# Altium PCB PCB_2021-06-06.pcbdoc
Units mm, origin at the board's own origin, x right, y up, seen from the top; angles counter-clockwise.
Board outline 104.52 x 102.24 mm, 2 copper layers (Top Layer, Bottom Layer); 19 components, 23 nets, 128 pads, 0 vias.
Unrouted connection lines stored in the file: 1.
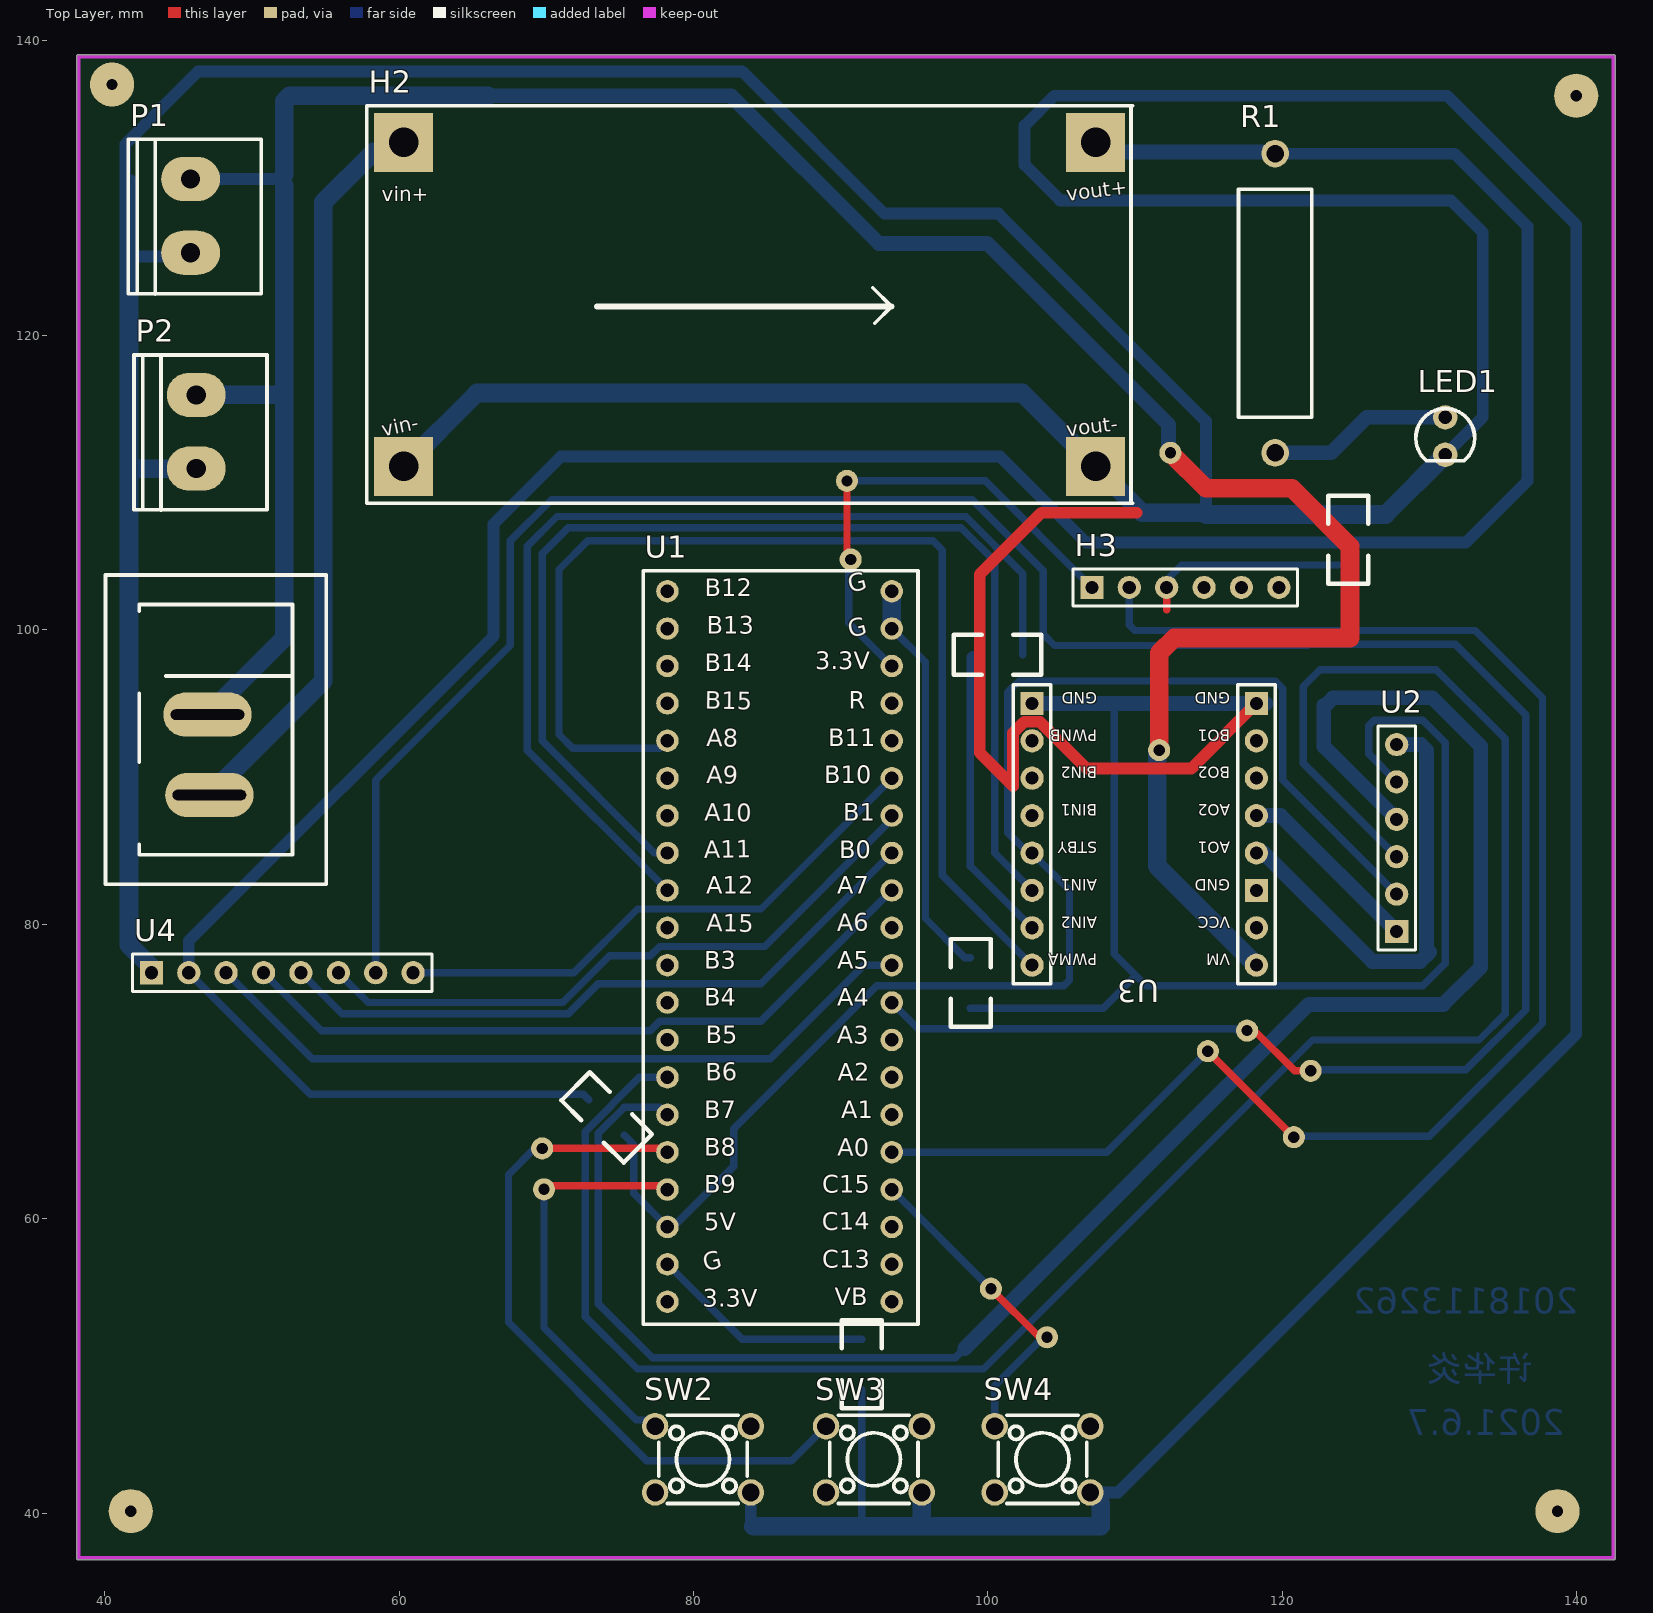
[diagram p0: Top Layer view]
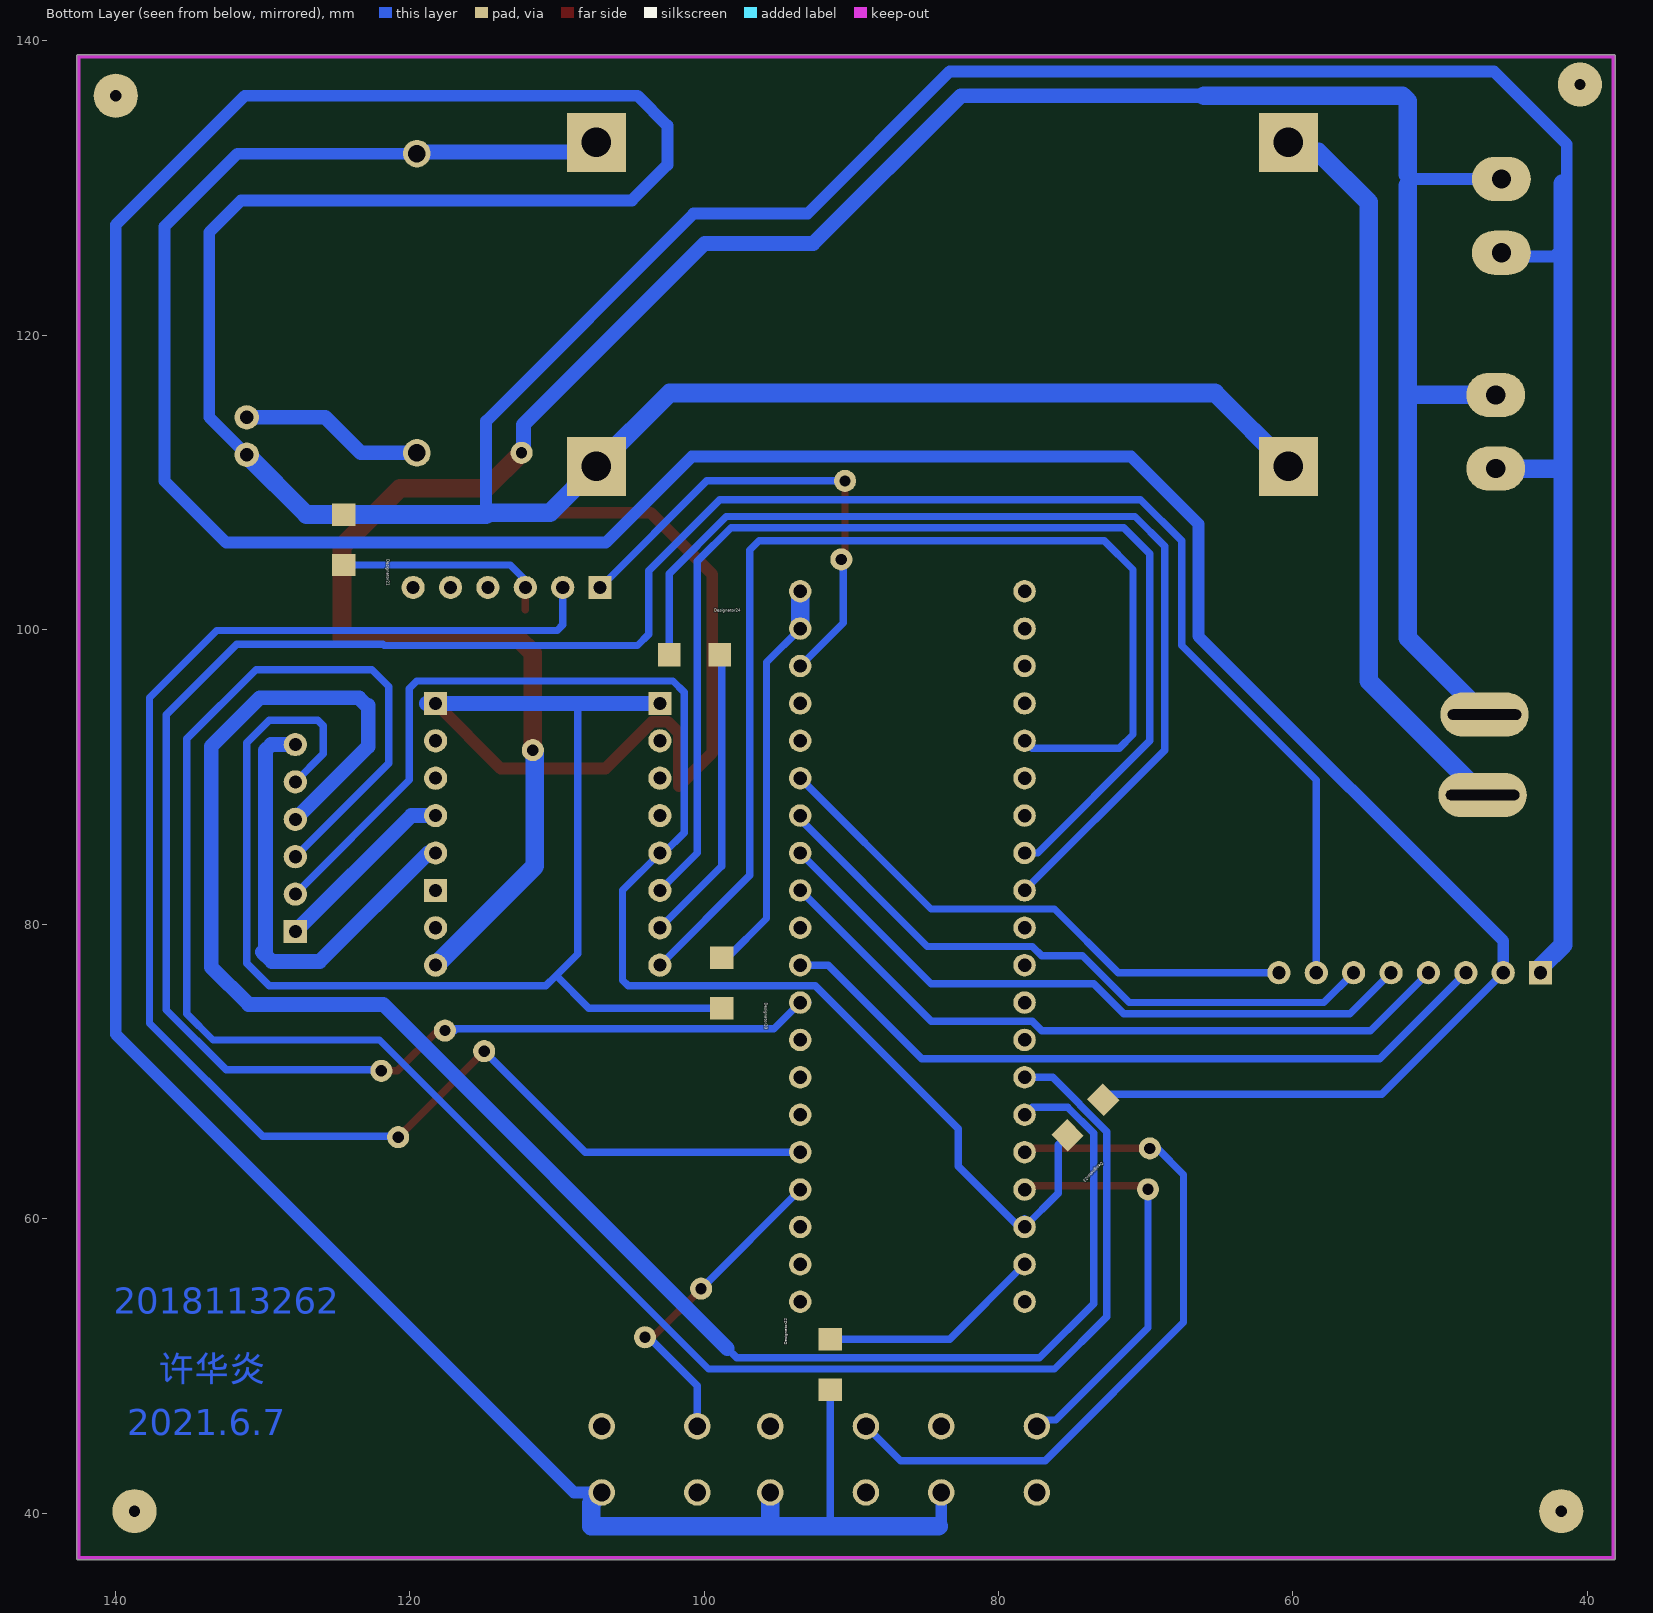
[diagram p1: Bottom Layer view, seen from below]
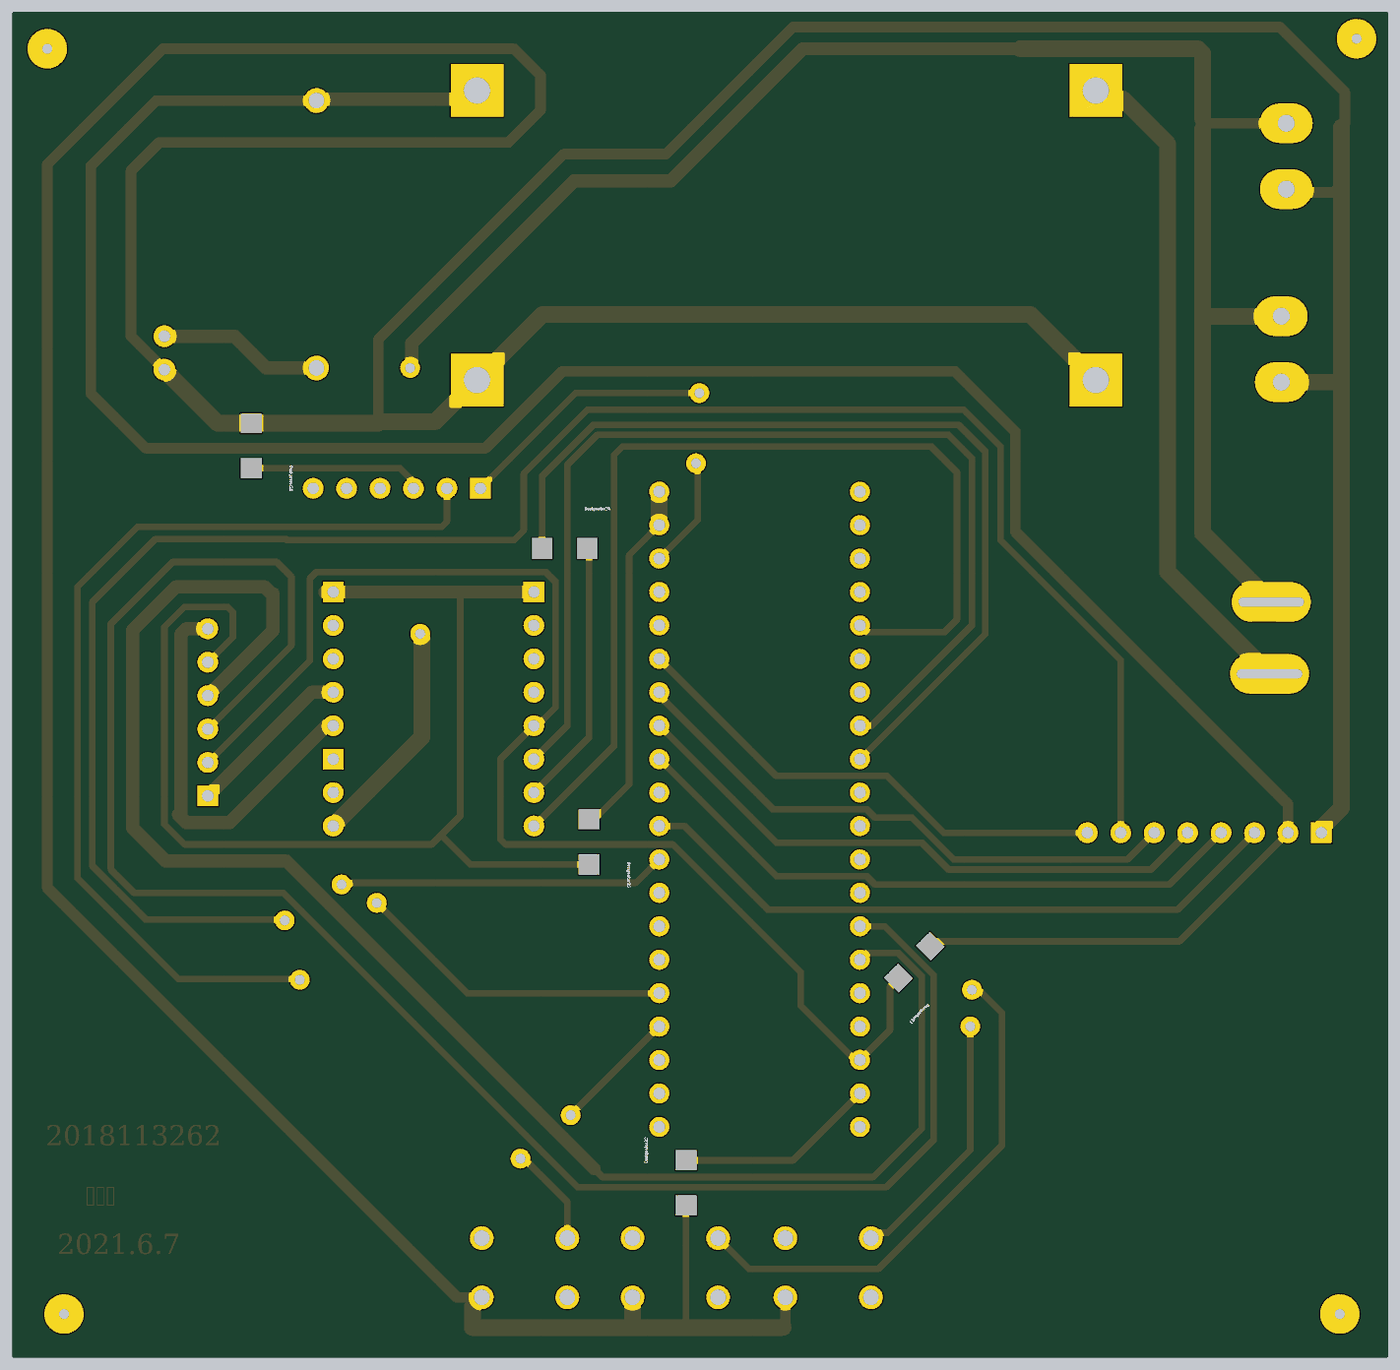
[diagram p2: 3D render of the assembled board from below, using the file's embedded part models]

## Layer stack, top to bottom
Top Solder: solder mask 0.0102, Solder Resist, Dk 3.5
Top Layer: signal copper 0.0356
Dielectric1: dielectric 0.32, FR-4, Dk 4.8
Bottom Layer: signal copper 0.0356
Bottom Solder: solder mask 0.0102, Solder Resist, Dk 3.5

## Board outline
38.1,36.957 ccw(c38.227,36.957) 38.227,36.83 142.494,36.83 ccw(c142.494,36.957) 142.621,36.957 142.621,138.938 ccw(c142.494,138.938) 142.494,139.065 38.227,139.065 ccw(c38.227,138.938) 38.1,138.938

## Design rules (kind name [scope] priority, off if disabled: settings)
Clearance [All] p1: gap=0.1 ignorepadtopadclearanceinfootprint=TRUE
DiffPairsRouting [All] p1: maxlimit=0.254 minlimit=0.1 mostfreqgap=0.254 toplayer_minwidth=0.1 toplayer_maxwidth=0.381 toplayer_prefwidth=0.381 bottomlayer_minwidth=0.1 bottomlayer_maxwidth=0.381 bottomlayer_prefwidth=0.381 maxuncoupledlength=12.7
PolygonConnect [All] p1: connectstyle=Relief reliefconductorwidth=0.254 reliefentries=4 polygonreliefangle="90 Angle" airgapwidth=0.254
RoutingVias [All] p1: holewidth=0.711 width=1.27 viastyle="Through Hole" minholewidth=0.711 minwidth=1.27 maxholewidth=0.711 maxwidth=1.27
SolderMaskExpansion [All] p1: expansion=0.102
Width [All] p1: maxlimit=1.27 minlimit=0.5 preferedwidth=0.8
29 further rules are at their usual default settings.

## Classes and differential pairs
component class Sheet_1_2021-06-06: H3 LED1 P1 P2 R1 SW2 SW3 SW4

## Components (designator, comment, footprint, x,y, rotation, side; value= is the part's Value field where it differs from the comment)
Designator20 "Comment" 1206R 98.806,74.295 r90 bottom
Designator21 "Comment" 1206R 124.46,104.394 r90 bottom
Designator22 "Comment" 1206R 91.44,51.816 r270 bottom
Designator23 "Comment" 1206R 75.311,65.659 r135 bottom
Designator24 "Comment" 1206R 98.933,98.298 r0 bottom
H2 "稳压模块" XL4015 77.881,122.82 r0 top
H3 "ADC位置测量" HDR-F-2.54_1X6 112.141,102.87 r0 top
LED1 "LED-TH-3mm_R" LED-TH_BD3.0_RED 131.064,113.157 r0 top
P1 "电池供电" CONN-TH_2P-P5.00 45.847,128.107 r90 top
P2 "直流电源供电" CONN-TH_2P-P5.00 46.228,113.447 r90 top
R1 "1k" R_AXIAL-0.8 119.507,122.174 r90 top
SW2 "TS665CJ" SW-TH_4P-L6.0-W6.0-P4.50-LS6.5 80.645,43.652 r0 top
SW3 "TS665CJ" SW-TH_4P-L6.0-W6.0-P4.50-LS6.5 92.254,43.652 r0 top
SW4 "TS665CJ" SW-TH_4P-L6.0-W6.0-P4.50-LS6.5 103.707,43.652 r0 top
U1 "STM32C8T6" "PCBComponent_1 - duplicate" 78.232,102.616 r0 top
U2 "编码器接口" HDR-F-2.54_1X6 127.762,84.582 r90 top
U3 "TB6612" TB6612 110.617,86.106 r180 top
U4 "TFT1.8LCD" HDR-F-2.54_1X8 50.8,76.704 r0 top
? "电源开关" SW-TH_SDDJE10700 43.18,93.345 r90 top

## Footprints (in the part's own frame and the unit in brackets; to place one, negate y for a bottom-side part, rotate by r counter-clockwise, add the part's x,y. Pads: shape width x height; smd on the part's side, far side on the other; paste and mask are expansions set on the pad)
1206R [mil]
  rect 60x62.99 smd: 1(0,0) 2(135,0)
  body extent 7,-31 133,31, height 24
CONN-TH_2P-P5.00 [mm]
  oval 3x4 hole 1.3: 1(-2.504,0) 2(2.504,0)
  silkscreen extent -5.32,-4.8 5.21,4.23
HDR-F-2.54_1X6 [mil]
  rect 62x62 hole 35: 1(-200,0)
  round 62 hole 35: 2(-100,0) 3(0,0) 4(100,0) 5(200,0) 6(300,0)
  silkscreen extent -250,-50 350,50
HDR-F-2.54_1X8 [mil]
  rect 62x62 hole 35: 1(-300,0)
  round 62 hole 35: 2(-200,0) 3(-100,0) 4(0,0) 5(100,0) 6(200,0) 7(300,0) 8(400,0)
  silkscreen extent -350,-50 450,50
LED-TH_BD3.0_RED [mil]
  round 65 hole 35.43: 1(0,50) 2(0,-50)
  silkscreen extent -79,-66 79,73
"PCBComponent_1 - duplicate" [mil]
  round 60 hole 36: 1(0,0) 2(0,-100) 3(0,-200) 4(0,-300) 5(0,-400) 6(0,-500) 7(0,-600) 8(0,-700) 9(0,-800) 10(0,-900) 11(0,-1000) 12(0,-1100) 13(0,-1200) 14(0,-1300) 15(0,-1400) 16(0,-1500) 17(0,-1600) 18(0,-1700) 19(0,-1800) 20(0,-1900) 21(600,-1900) 22(600,-1800) 23(600,-1700) 24(600,-1600) 25(600,-1500) 26(600,-1400) 27(600,-1300) 28(600,-1200) 29(600,-1100) 30(600,-1000) 31(600,-900) 32(600,-800) 33(600,-700) 34(600,-600) 35(600,-500) 36(600,-400) 37(600,-300) 38(600,-200) 39(600,-100) 40(600,0)
  silkscreen extent -65,-1960 670,55
R_AXIAL-0.8 [mil]
  round 74 hole 47.2: 1(-400,0) 2(400,0)
  silkscreen extent -305,-98 305,98
SW-TH_4P-L6.0-W6.0-P4.50-LS6.5 [mm]
  round 1.8 hole 1.2: 1(-3.25,2.25) 2(3.25,2.25) 3(-3.25,-2.25) 4(3.25,-2.25)
  silkscreen extent -3,-3 3,3
SW-TH_SDDJE10700 [mm]
  oval 3x6 hole 0.7 slot 5 at 90 deg: 1(-4.572,-3.937) 2(0.889,-3.81)
  silkscreen extent -10.63,-11.88 10.37,3.12
TB6612 [mil]
  round 62 hole 35: 1(-300,350) 2(-300,250) 4(-300,50) 5(-300,-50) 6(-300,-150) 7(-300,-250) 9(300,350) 10(300,250) 11(300,150) 12(300,50) 13(300,-50) 14(300,-150) 15(300,-250)
  rect 62x62 hole 35: 3(-300,150) 8(-300,-350) 16(300,-350)
  silkscreen extent -350,-400 350,400
XL4015 [mm]
  rect 4x4 hole 2: 1(-17.566,10.276) 2(29.434,10.276) 3(-17.566,-11.724) 4(29.434,-11.724)
  silkscreen extent -20.07,-14.22 31.93,12.78

## Part data
LED1: BOM_Manufacturer=EVERLIGHT(台湾, BOM_Manufacturer Part=204-10SDRD/S530-A3-L, BOM_Supplier=LCSC, BOM_Supplier Part=C84774, Contributor=LCEDA_Lib, spicePre=L, spiceSymbolName=LED-TH-3mm_R
SW2 SW3 SW4: BOM_JLCPCB Part Class="Extended Part", BOM_Manufacturer="SHOU HAN", BOM_Manufacturer Part=TS665CJ, BOM_Supplier=LCSC, BOM_Supplier Part=C393938, Contributor=LCSC, spicePre=S, spiceSymbolName=TS665CJ
?: BOM_JLCPCB Part Class="Extended Part", BOM_Manufacturer=ALPSALPINE(阿尔卑, BOM_Manufacturer Part=SDDJE10700, BOM_Supplier=LCSC, BOM_Supplier Part=C358626, Contributor=LCSC, spicePre=S, spiceSymbolName=SDDJE10700
H2: BOM_Supplier=LCSC, BOM_Supplier Part=C239342, Contributor=LCEDA_Lib, spicePre=H, spiceSymbolName=HDR-F-2.54_2x2
H3: BOM_Supplier=LCSC, BOM_Supplier Part=C40877, Contributor=LCEDA_Lib, spicePre=H, spiceSymbolName=HDR-F-2.54_1x6
P1 P2: BOM_Supplier=LCSC, Contributor=LCEDA_Lib, spicePre=P, spiceSymbolName=CONN-TH_2P-P5.00
R1: Contributor=LCEDA_Lib, nameAlias=Value(Ω), spicePre=R, spiceSymbolName=R_AXIAL-0.8_US
U1: Contributor=control_youself, spicePre=U, spiceSymbolName=STM32C8T6
U2: Contributor=control_youself, spicePre=U, spiceSymbolName=编码
U3: Contributor=control_youself, spicePre=U, spiceSymbolName=TB6612
U4: Contributor=control_youself, spicePre=U, spiceSymbolName=TFT1.8LCD

## Free pads (board coordinates)
  round 1.5 hole 0.762: 4(69.723,64.77) 4(69.85,61.992) 4(90.424,110.109) 4(90.678,104.775) 4(100.203,55.245) 4(104.013,51.943) 4(111.633,91.821) 4(112.395,112.014) 4(114.935,71.374) 4(117.602,72.771) 4(120.777,65.532) 4(121.92,70.04)
  round 3 hole 0.762: 7(40.513,137.033) 7(41.783,40.132) 7(138.684,40.132) 7(139.954,136.271)

## Nets (pads, with @x,y where several pads share a name; then routed paths per layer and width w, separated by ;. In a path a pad name is that pad's centre, name@x,y a point inside that pad or via, vN(x,y) a via of type N, cw(c..) or ccw(c..) an arc to the next point about the centre after c; other vN are vias at no path point)
+5V: Designator23.1 Designator23.2 H2.2 R1.2 U1.18 U2.2 U3.12 U4.2 | length 296.9
  Bottom Layer w0.5: U4.2 53.971,68.453 72.517,68.453 Designator23.2 ; Designator23.1 75.946,65.024 75.946,61.722 U1.18 78.232,59.993 78.701,59.524 82.74,63.563 82.74,66.103 92.456,75.819 105.156,75.819 105.537,76.2 105.537,82.296 U3.12 102.729,84.836 101.346,86.219 101.346,95.758 102.108,96.52 119.507,96.52 120.015,96.012 120.015,89.789 U2.2
  Bottom Layer w0.8: U4.2 45.72,78.867 66.421,99.568 66.421,107.188 70.993,111.76 100.838,111.76 106.68,105.918 132.461,105.918 136.652,110.109 136.652,127.381 131.699,132.334 R1.2
  Bottom Layer w1: H2.2@106.904,132.45 119.391,132.45 R1.2
+12V: ?.2 P1.2 P2.2 pad.4@111.633,91.821 pad.4@112.395,112.014 U3.1 | length 185.3
  Top Layer w1.27: pad.4@111.633,91.821 111.633,98.425 112.649,99.441 124.587,99.441 124.587,105.664 120.65,109.601 114.808,109.601 pad.4@112.395,112.014
  Bottom Layer w0.5: 51.76,130.612 52.197,130.175
  Bottom Layer w0.8: P1.2 51.76,130.612 51.872,130.612 52.197,130.937
  Bottom Layer w1: 66.04,136.271 82.55,136.271 92.583,126.238 99.949,126.238 112.268,113.919 pad.4@112.268,112.395
  Bottom Layer w1.27: P2.2 52.197,115.951 ; ?.2 52.197,99.441 52.197,115.951 ; 52.197,130.175 52.197,115.951 ; 52.197,130.937 52.197,135.89 52.578,136.271 66.04,136.271 ; pad.4@111.506,91.567 111.506,83.947 U3.1
GND: Designator20.1 Designator20.2 Designator21.1 Designator21.2 Designator22.1 Designator22.2 H2.3 H2.4 H3.3 LED1.2 P1.1 P2.1 SW2.4 SW3.4 SW4.4 U1.19 U1.39 U1.40 U2.5 U3.8 U3.16 U4.1 | length 673.6
  Top Layer w0.5: 112.141,101.346 H3.3
  Top Layer w0.8: 110.109,107.95 103.632,107.95 99.441,103.759 99.441,91.651 101.71,89.383 101.71,92.989 102.464,93.743 103.53,93.743 106.703,90.571 113.812,90.571 U3.8
  Bottom Layer w0.5: U1.19 83.312,51.816 Designator22.1 ; 91.44,39.497 Designator22.2 ; U1.39 95.758,97.79 95.758,80.391 98.425,77.724 Designator20.2 ; Designator20.1 107.823,74.295 110.045,76.517 ; 108.585,94.996 108.585,77.978 110.045,76.517 ; H3.3 112.141,103.378 113.157,104.394 Designator21.1 ; U2.5 125.857,91.567 125.857,93.472 126.238,93.853 129.54,93.853 131.064,92.329 131.064,77.343 129.54,75.819 110.744,75.819 110.045,76.517
  Bottom Layer w0.8: 41.656,125.984 42.291,125.349 45.847,125.349 P1.1 ; 41.656,130.302 41.402,130.556 41.402,132.969 46.355,137.922 83.312,137.922 92.964,128.27 100.711,128.27 114.808,114.173 114.808,107.95 114.808,107.823 ; SW2.4 83.895,39.295 84.074,39.116 ; SW4.4 108.839,41.402 139.954,72.517 139.954,127.508 131.191,136.271 104.521,136.271 102.489,134.239 102.489,131.572 104.902,129.159 131.445,129.159 133.604,127 133.604,114.427 LED1.2
  Bottom Layer w1: U3.16 108.585,94.996 U3.8 U3.8@118.872,94.996
  Bottom Layer w1.27: 41.656,130.302 41.656,125.984 41.656,110.744 ; U4.1 43.18,77.089 41.656,78.613 41.656,110.744 ; P2.1 41.854,110.942 41.656,110.744 ; H2.3 65.297,116.078 102.333,116.078 H2.4 110.461,107.95 114.808,107.95 ; 84.074,39.116 95.377,39.116 ; U1.39 U1.40 ; SW3.4 95.504,39.243 95.377,39.116 ; SW4.4 107.669,40.69 107.669,39.116 95.377,39.116 ; 114.808,107.823 Designator21.2 127,107.823 LED1.2
"Net _1": ?.1 H2.1 | length 49.9
  Bottom Layer w1.27: ?.1 54.864,96.52 54.864,129.032 58.282,132.45 H2.1@59.904,132.45
NetH3_1: H3.1 pad.4@90.424,110.109 pad.4@90.678,104.775 U1.38 | length 34
  Top Layer w0.5: pad.4@90.424,110.109 90.424,105.029 pad.4@90.678,104.775
  Bottom Layer w0.5: pad.4@90.297,109.982 90.424,110.109 99.822,110.109 H3.1 ; pad.4@90.551,105.029 90.551,100.457 U1.38
NetH3_2: H3.2 pad.4@114.935,71.374 pad.4@120.777,65.532 U1.25 | length 106.4
  Top Layer w0.5: pad.4@114.935,71.374 pad.4@120.777,65.532
  Bottom Layer w0.5: U1.25 108.077,64.516 114.364,70.802 ; H3.2 109.601,100.33 109.982,99.949 133.096,99.949 137.668,95.377 137.668,73.279 129.984,65.596 pad.4@120.968,65.596
NetLED1_1: LED1.1 R1.1 | length 12.6
  Bottom Layer w1: R1.1 123.317,112.014 125.73,114.427 LED1.1
NetU1_5: U1.5 U3.9 | length 77
  Bottom Layer w0.5: U1.5 77.724,91.948 71.805,91.948 70.866,92.887 70.866,104.09 72.821,106.045 96.266,106.045 96.901,105.41 96.901,83.312 U3.9
NetU1_8: U1.8 U3.11 | length 80.2
  Bottom Layer w0.5: U1.8 77.343,84.836 69.723,92.456 69.723,105.156 71.501,106.934 98.171,106.934 100.457,104.648 100.457,84.836 U3.11
NetU1_9: Designator24.1 Designator24.2 U1.9 U3.10 | length 89.3
  Bottom Layer w0.5: U1.9 68.707,91.821 68.707,105.664 70.731,107.688 98.483,107.688 102.362,103.809 Designator24.2 ; Designator24.1 98.806,98.171 98.806,83.947 U3.10
NetU1_14: U1.14 U2.3 | length 142.6
  Bottom Layer w0.5: U1.14 76.327,69.596 72.644,65.913 72.644,53.34 76.2,49.784 99.695,49.784 122.047,72.136 133.35,72.136 135.128,73.914 135.128,92.583 130.429,97.282 122.555,97.282 121.412,96.139 121.412,90.932 U2.3
NetU1_15: U1.15 U2.4 | length 126.7
  Bottom Layer w0.5: U1.15 77.724,67.564 75.311,67.564 73.537,65.79 73.537,54.225 77.216,50.546 97.79,50.546 98.425,51.181
  Bottom Layer w1: 98.425,51.181 121.793,74.549 130.937,74.549 133.477,77.089 133.477,92.075 130.175,95.377 123.444,95.377 122.936,94.869 122.809,94.869 122.809,92.075 U2.4
NetU1_29: pad.4@117.602,72.771 pad.4@121.92,70.04 U1.29 U4.7 | length 179
  Top Layer w0.5: pad.4@117.602,72.771 118.11,72.771 120.84,70.04 pad.4@121.92,70.04
  Bottom Layer w0.5: U4.7 58.42,89.789 67.564,98.933 67.564,106.045 70.358,108.839 98.933,108.839 103.759,104.013 103.759,99.695 104.521,98.933 121.734,98.933 121.822,99.021 131.738,99.021 136.525,94.234 136.525,74.168 132.461,70.104 pad.4@122.301,70.104 ; U1.29@92.964,74.676 U1.29 95.25,72.898 116.84,72.898 117.221,72.517 pad.4@117.602,72.898
NetU1_30: U1.30 U4.3 | length 50.3
  Bottom Layer w0.5: U4.3 54.102,70.862 85.213,70.862 91.567,77.216 U1.30
NetU1_32: U1.32 U4.4 | length 48.2
  Bottom Layer w0.5: U4.4 54.733,72.771 77.077,72.771 77.708,73.402 84.578,73.402 U1.32
NetU1_33: U1.33 U4.5 | length 45.8
  Bottom Layer w0.5: U4.5 56.13,73.914 71.501,73.914 73.537,75.95 84.586,75.95 U1.33
NetU1_34: U1.34 U4.6 | length 43.8
  Bottom Layer w0.5: U4.6 57.908,74.676 71.12,74.676 74.295,77.851 77.077,77.851 77.708,78.482 84.832,78.482 93.472,87.122 U1.34
NetU1_35: U1.35 U4.8 | length 38
  Bottom Layer w0.5: U4.8 71.878,76.704 76.204,81.03 84.586,81.03 U1.35
NetU2_1: U2.1 U3.5 | length 12.8
  Bottom Layer w1: U3.5 119.888,87.376 U2.1
NetU2_6: U2.6 U3.4 | length 31.2
  Bottom Layer w1: U3.4 118.745,84.836 126.111,77.47 129.364,77.47 129.999,78.105 129.794,78.105 129.794,91.821 129.413,92.202 U2.6
PB8: pad.4@69.723,64.77 SW3.1 U1.16 | length 48.1
  Top Layer w0.5: pad.4@69.723,64.77 77.978,64.77 U1.16
  Bottom Layer w0.5: pad.4@69.723,64.77 69.215,64.77 67.437,62.992 67.437,52.959 76.835,43.561 86.663,43.561 SW3.1
PB9: pad.4@69.85,61.992 SW2.1 U1.17 | length 27.9
  Top Layer w0.5: pad.4@69.977,62.23 77.978,62.23 U1.17
  Bottom Layer w0.5: pad.4@69.85,61.992 69.85,52.578 76.109,46.319 SW2.1@77.395,46.319
PC15: pad.4@100.203,55.245 pad.4@104.013,51.943 SW4.1 U1.24 | length 22.1
  Top Layer w0.5: pad.4@100.203,55.245 103.505,51.943 pad.4@104.013,51.943
  Bottom Layer w0.5: U1.24 pad.4@100.203,55.245 ; SW4.1 100.457,48.641 pad.4@103.759,51.943
pads on no net: H3.4 H3.5 H3.6 SW2.2 SW2.3 SW3.2 SW3.3 SW4.2 SW4.3 U1.1 U1.2 U1.3 U1.4 U1.6 U1.7 U1.10 U1.11 U1.12 U1.13 U1.20 U1.21 U1.22 U1.23 U1.26 U1.27 U1.28 U1.31 U1.36 U1.37 U3.2 U3.3 U3.6 U3.7 U3.13 U3.14 U3.15

## Keep-outs
Keep-Out Layer:
  lines w0.254: 38.227,36.957 142.494,36.957 142.494,138.938 38.227,138.938 38.227,36.957

## Other copper
Bottom Layer:
  text "2018113262" at 140.081,52.959 h3
  text "许华炎" at 137.033,48.387 h3
  text "2021.6.7" at 139.192,44.704 h3

## Silkscreen, mask and mechanical layers (free items; w line width, h text height)
Document:
  lines w0.003: 171.514,30.29 171.564,30.34

## Text inside footprints (layer, text, board x,y; h text height)
H2: Top Overlay "vin-" at 58.919,113.107 h1 r12; Top Overlay "vin+" at 58.815,129.096 h1; Top Overlay "vout+" at 105.376,129.1 h1 r7; Top Overlay "vout-" at 105.376,113.1 h1 r7
U1: Top Overlay "B12" at 80.772,101.854 h2.03; Top Overlay "3.3V" at 80.645,53.594 h2.03; Top Overlay "VB" at 89.592,53.716 h2.03; Top Overlay "C13" at 88.752,56.256 h2.03; Top Overlay "C14" at 88.758,58.796 h2.03 r1; Top Overlay "C15" at 88.742,61.336 h2.03; Top Overlay "A0" at 89.752,63.871 h2.03 r359; Top Overlay "A1" at 90.022,66.411 h2.03; Top Overlay "A2" at 89.784,68.951 h2.03; Top Overlay "A3" at 89.748,71.491 h2.03 r359; Top Overlay "A4" at 89.776,74.036 h2.03; Top Overlay "A5" at 89.761,76.576 h2.03; Top Overlay "A6" at 89.77,79.116 h2.03 r1; Top Overlay "A7" at 89.771,81.656 h2.03; Top Overlay "B0" at 89.91,84.074 h2.03; Top Overlay "B1" at 90.158,86.609 h2.03; Top Overlay "B10" at 88.898,89.149 h2.03; Top Overlay "B11" at 89.147,91.689 h2.03; Top Overlay "R" at 90.551,94.234 h2.03; Top Overlay "3.3V" at 88.265,96.901 h2.03; Top Overlay "G" at 90.739,99.06 h2.03 r14; Top Overlay "G" at 90.739,102.108 h2.03 r14; Top Overlay "G" at 80.899,56.007 h2.03 r14; Top Overlay "5V" at 80.744,58.796 h2.03; Top Overlay "B9" at 80.744,61.336 h2.03; Top Overlay "B8" at 80.716,63.871 h2.03; Top Overlay "B7" at 80.716,66.411 h2.03; Top Overlay "B6" at 80.843,68.951 h2.03 r1; Top Overlay "B5" at 80.843,71.491 h2.03; Top Overlay "B4" at 80.744,74.036 h2.03; Top Overlay "B3" at 80.744,76.576 h2.03; Top Overlay "A15" at 80.871,79.116 h2.03 r359; Top Overlay "A12" at 80.871,81.656 h2.03; Top Overlay "A11" at 80.744,84.069 h2.03 r1; Top Overlay "A10" at 80.744,86.609 h2.03 r359; Top Overlay "A9" at 80.871,89.149 h2.03 r359; Top Overlay "A8" at 80.871,91.689 h2.03 r359; Top Overlay "B14" at 80.772,96.774 h2.03; Top Overlay "B15" at 80.772,94.234 h2.03 r359; Top Overlay "B13" at 80.899,99.314 h2.03
U3: Top Overlay "VM" at 116.459,77.978 h0.76 r180; Top Overlay "VCC" at 116.459,80.518 h0.76 r180; Top Overlay "GND" at 116.459,83.058 h0.76 r180; Top Overlay "AO1" at 116.459,85.598 h0.76 r180; Top Overlay "AO2" at 116.459,88.138 h0.76 r180; Top Overlay "BO2" at 116.459,90.678 h0.76 r180; Top Overlay "BO1" at 116.459,93.218 h0.76 r180; Top Overlay "GND" at 116.459,95.758 h0.76 r180; Top Overlay "PWMA" at 107.442,77.978 h0.76 r180; Top Overlay "AIN2" at 107.442,80.518 h0.76 r180; Top Overlay "AIN1" at 107.442,83.058 h0.76 r180; Top Overlay "STBY" at 107.442,85.598 h0.76 r180; Top Overlay "BIN1" at 107.442,88.138 h0.76 r180; Top Overlay "BIN2" at 107.442,90.678 h0.76 r180; Top Overlay "PWNB" at 107.442,93.218 h0.76 r180; Top Overlay "GND" at 107.442,95.758 h0.76 r180